# EAGLE board MFOS_NT_eurorack_panel (EAGLE 7.3.0)
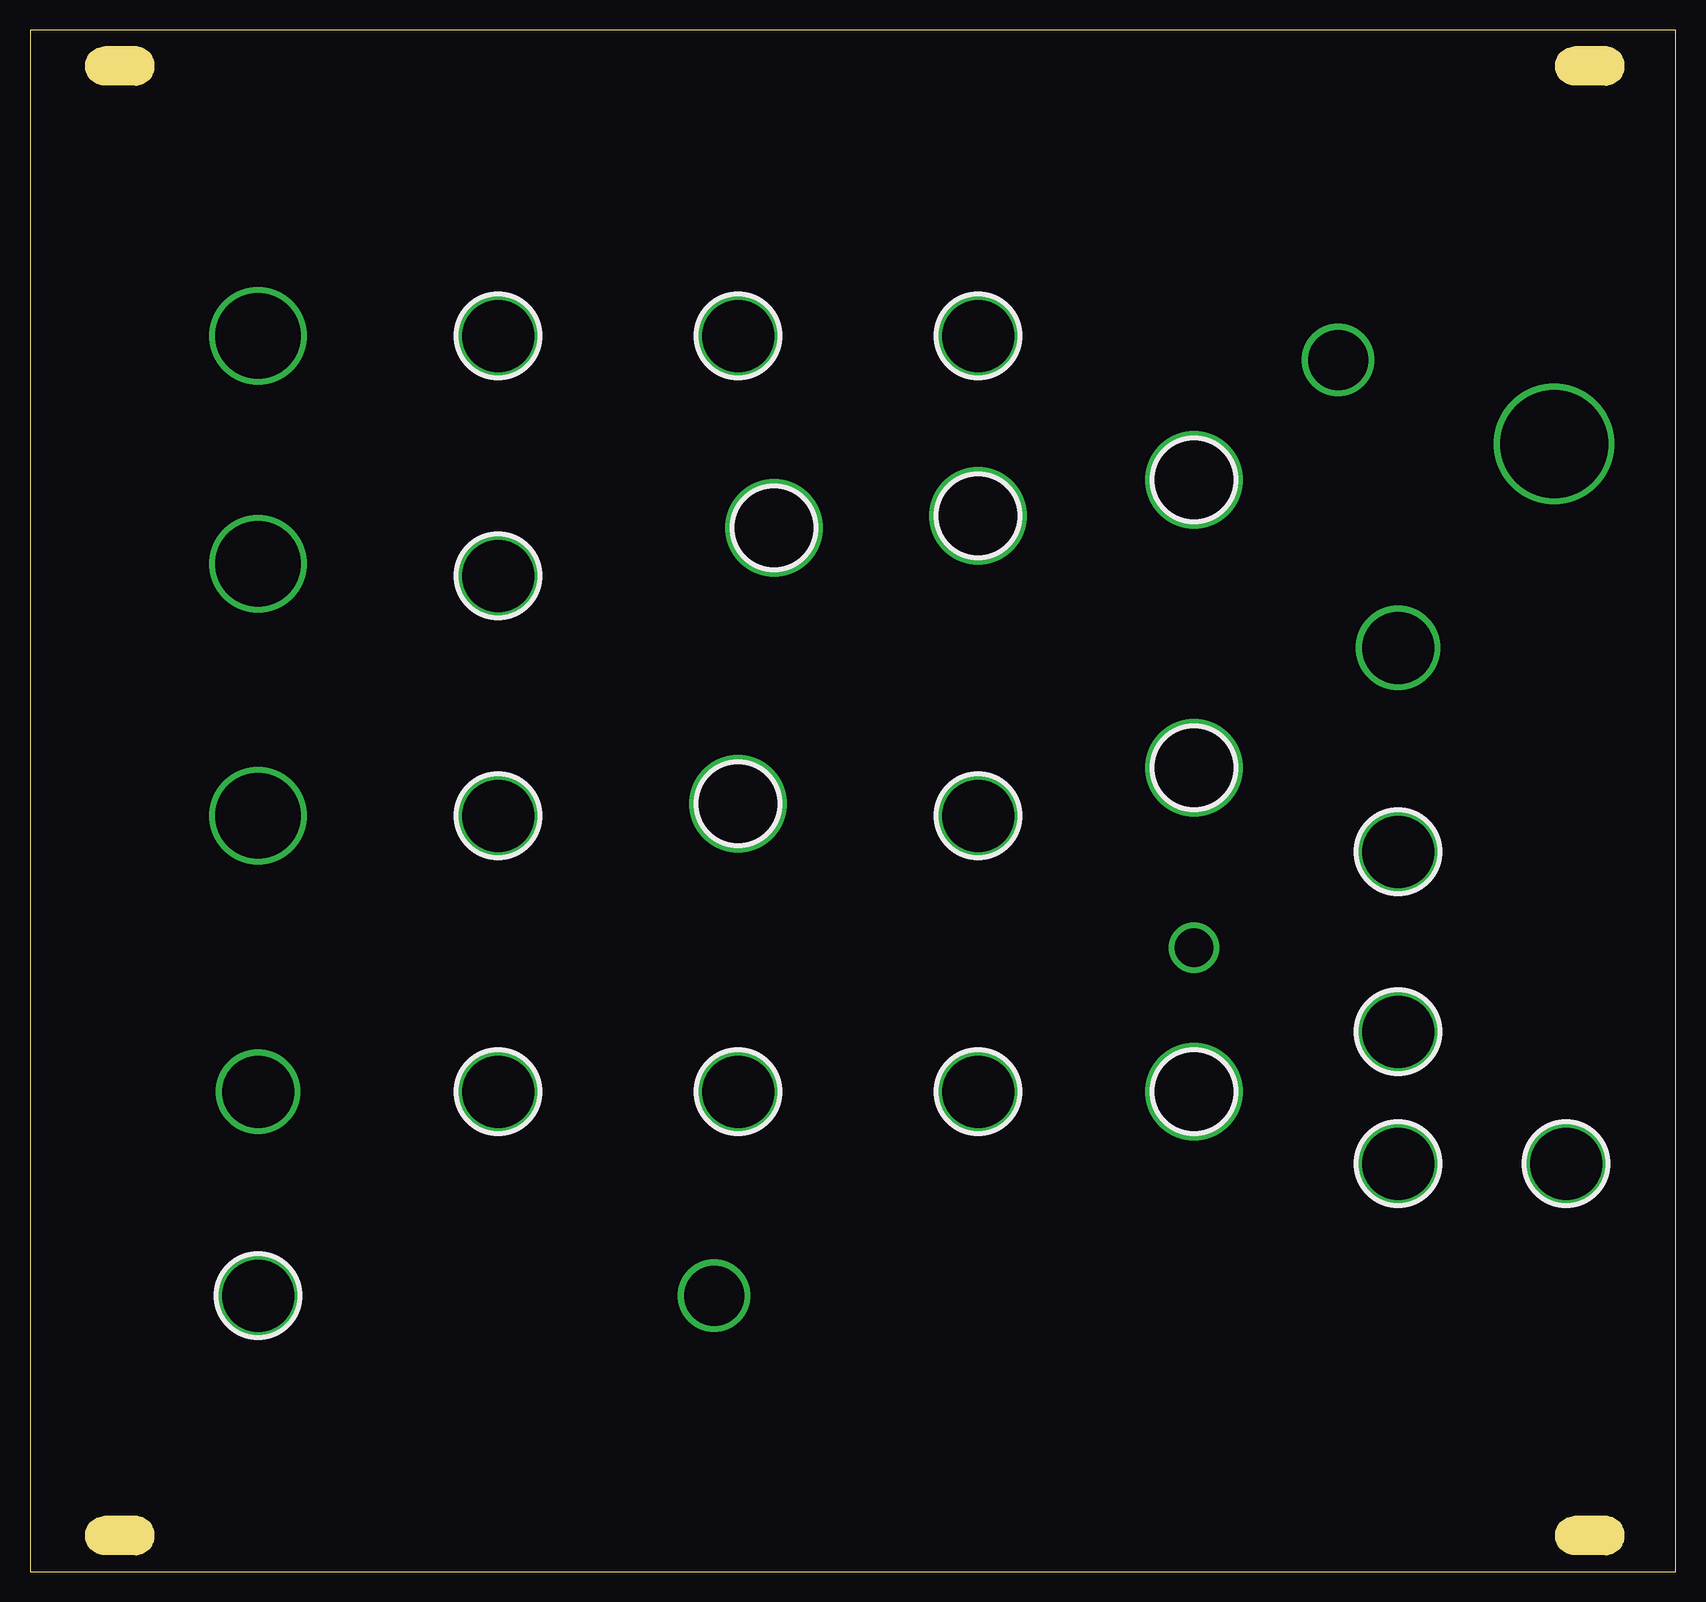
[diagram p0: board, top side]
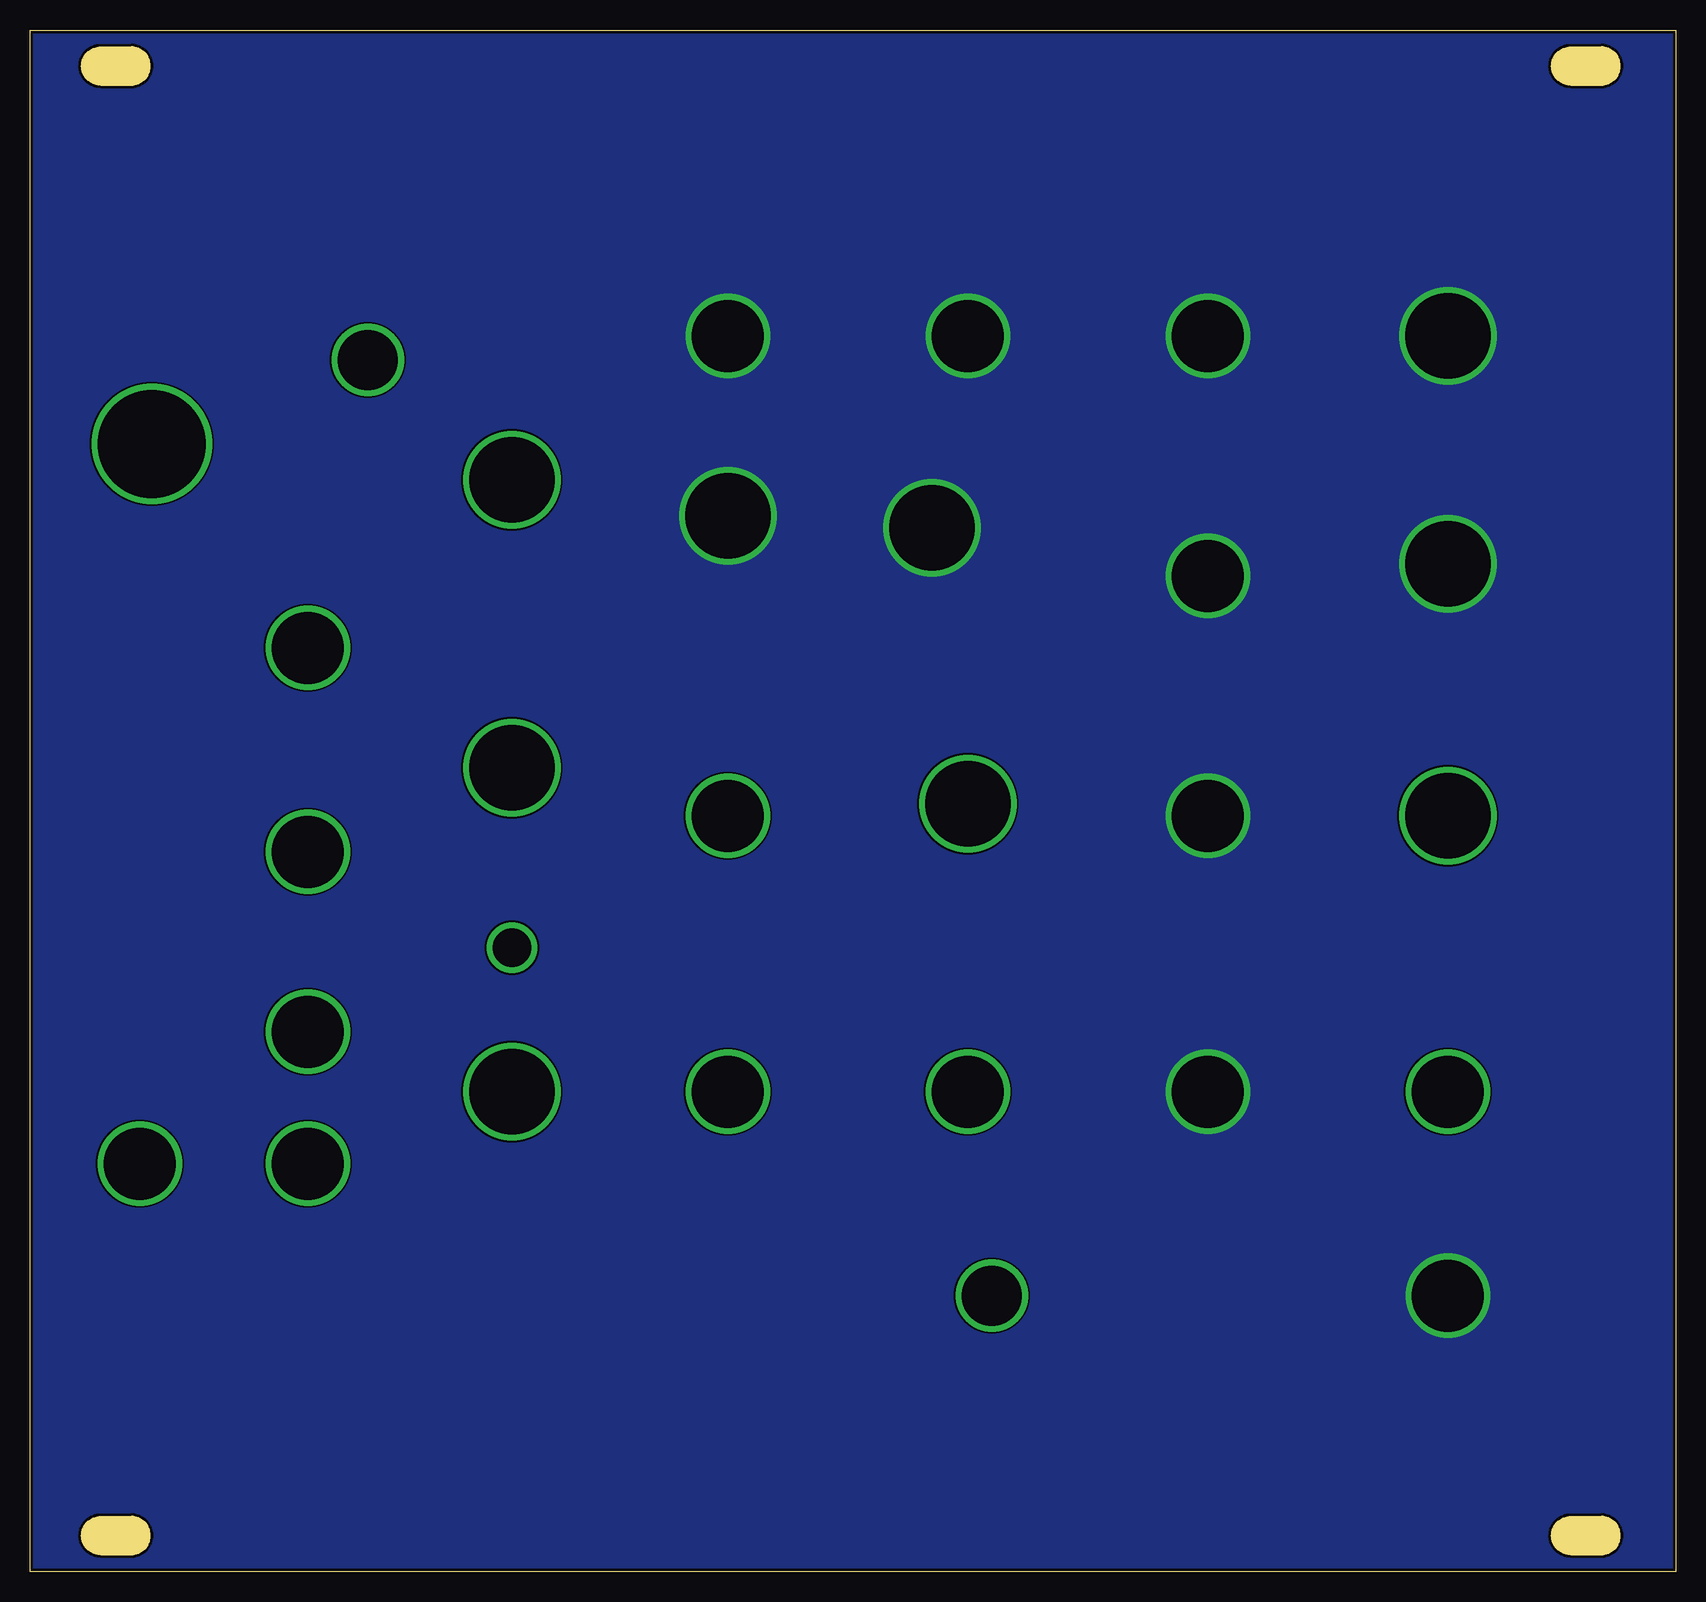
[diagram p1: board, bottom side, seen from below]

Size 137.16 x 128.5 mm. Coordinates in mm from the lower left corner, seen from the top.
Outline: 137.16,0 137.16,128.5 0,128.5 0,0 137.16,0
Copper layers (1*2*15*16): Top 0.035mm / dielectric 0.2mm / Route2 0.0175mm / dielectric 1.1mm / Route15 0.0175mm / dielectric 0.2mm / Bottom 0.035mm
Design rules "SeeedStudio_DRU_no_angle_20130527": minimum track width 6mil, minimum drill 12mil, track to track 6mil, track to pad 6mil, pad to pad 6mil, via to via 6mil, smd to smd 0mil, copper to edge 10mil, drill to drill 10mil, minimum pad ring 6mil, minimum via ring 6mil, stop-mask expansion 2mil, vias tented up to drill 25mil, thermal gap 10mil
Net classes: 1 power: width 0.406 mm; 2 ground: width 0.305 mm

## Placement (x,y rotation side)
U$1  [SLOT_HOLE]  7.5,3 180 top
U$2  [SLOT_HOLE]  7.5,125.5 180 top
U$3  [SLOT_HOLE]  130,3 180 top
U$4  [SLOT_HOLE]  130,125.5 180 top

## Library data of the parts
U$1-U$4 = MusicThingModular

## Tracks (layer width: path | path; a pad name or v marks a point on that pad's centre or on a via)
GND  (via drill 6, 7.1)
  other vias: 39,63 39,83 39,40 79,103 59,103 19,23 79,88 39,103 19,84 19,103 62,87
  pour Bottom: -5.04,-1.77 -5.58,132.49 141.38,131.49 140.91,-1.77
GND1  (via drill 6)
  other vias: 19,40
GND2  (via drill 7.1)
  other vias: 97,91
GND3  (via drill 7.1)
  other vias: 59,64
GND4  (via drill 7.1)
  other vias: 97,67 97,40
GND5  (via drill 7.1)
  other vias: 19,63
GND6  (via drill 6)
  other vias: 79,63
GND7  (via drill 6)
  other vias: 79,40 59,40
GND8  (via drill 6)
  other vias: 114,34 114,45 128,34
GND9  (via drill 3.2, 5, 6, 9)
  other vias: 114,60 114,77 97,52 127,94 57,23 109,101